# Altium PCB STM32F302VC_EVM.PcbDoc (part 18 of 19)
Units mil, origin at the board's own origin, x right, y up, seen from the top; angles counter-clockwise.
Board outline 3937.01 x 3937.01 mil, 2 copper layers (Top Layer, Bottom Layer); 117 components, 166 nets, 602 pads, 373 vias.
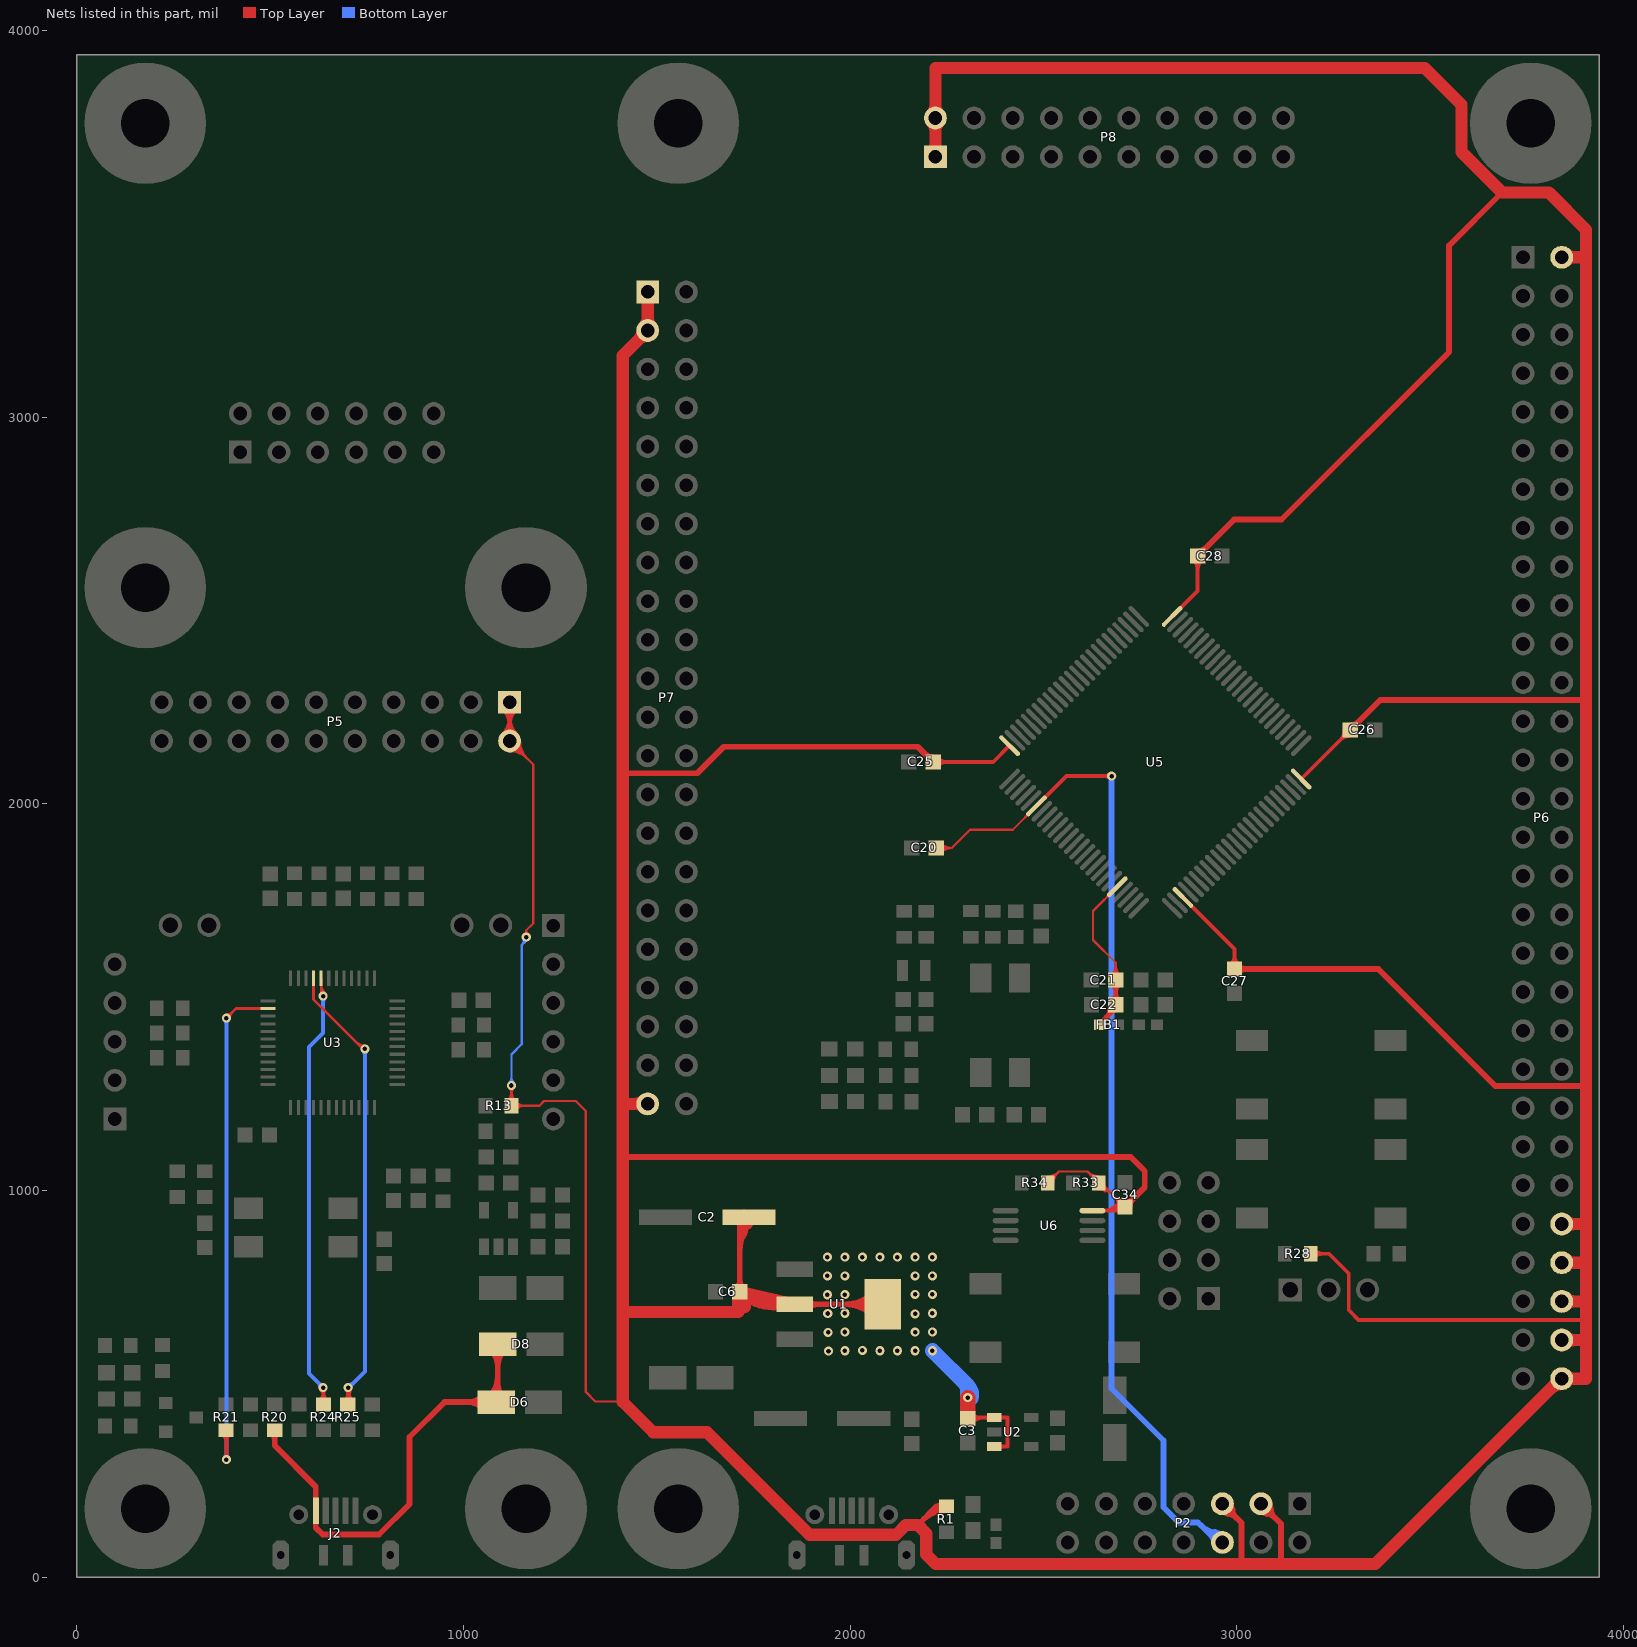
[diagram p18: the nets of this part, all layers, seen from the top]

## Via types
v1: diameter 23.62, hole 11.81, Top Layer to Bottom Layer, tented both sides, 372 vias
v2: diameter 50, hole 28, Top Layer to Bottom Layer, tented both sides, 1 vias

## Nets (pads, with @x,y where several pads share a name; then routed paths per layer and width w, separated by ;. In a path a pad name is that pad's centre, name@x,y a point inside that pad or via, vN(x,y) a via of type N, cw(c..) or ccw(c..) an arc to the next point about the centre after c; other vN are vias at no path point) (continued)
TVCC: C2.1 C3.2 C6.2 C25.2 C26.2 C27.2 C28.2 C34.2 P2.3 P2.5 P5.1 P5.2 P6.2 P6.52 P6.54 P6.56 P6.58 P6.60 P7.1 P7.3 P7.43 P8.1 P8.2 R1.1 R13.1 R28.2 R33.2 R34.1 U1.2 U1.4 U2.1 U2.3 U5.28 U5.50 U5.75 U5.100 U6.8 | length 36358.6
  Top Layer w6: P5.2@1119.29,2162.6 1180.26,2101.63 1180.26,1690.85 1162.4,1672.99 ; v1(1124.02,1271.65) R13.1@1124.02,1219.49 1196.56,1219.49 1208.37,1231.3 1290.35,1231.3 1316.53,1205.12 1316.53,478.78 1340.98,454.33 1411.36,454.33 1411.95,453.74 ; v1(1162.4,1655.51) 1162.4,1672.99 ; R34.1@2510.83,1019.68 2540.35,1049.21 2613.39,1049.21 R33.2@2642.91,1019.68 2648.75,1019.68 C34.2@2710.76,957.68 ; R13.1@1113.61,1231.86 ccw(c1088.49,1256.99) 1124.02,1256.99 ; R13.1@1113.61,1231.86 ccw(c1088.49,1256.99) 1124.02,1256.99 ; R13.1@1113.61,1231.86 ccw(c1088.49,1256.99) 1124.02,1256.99 ; P5.2@1115.83,2162.34 ccw(c1143.63,2164.41) 1136.42,2137.48 ; P5.2@1115.83,2162.34 ccw(c1143.63,2164.41) 1136.42,2137.48 ; P5.2@1115.83,2162.34 ccw(c1143.63,2164.41) 1136.42,2137.48 ; v1@1117.79,1265.42 cw(c1102.74,1250.38) 1124.02,1250.38 ; v1@1117.79,1265.42 cw(c1102.74,1250.38) 1124.02,1250.38 ; v1@1117.79,1265.42 cw(c1102.74,1250.38) 1124.02,1250.38 ; R13.1@1117.85,1227.62 ccw(c1102.97,1242.5) 1124.02,1242.5 ; R13.1@1117.85,1227.62 ccw(c1102.97,1242.5) 1124.02,1242.5 ; R13.1@1117.85,1227.62 ccw(c1102.97,1242.5) 1124.02,1242.5 ; P5.2@1119.1,2160.08 cw(c1116.81,2129.33) 1146.6,2137.31 ; P5.2@1119.1,2160.08 cw(c1116.81,2129.33) 1146.6,2137.31 ; P5.2@1119.1,2160.08 cw(c1116.81,2129.33) 1146.6,2137.31 ; P5.2@1119.29,2136.07 cw(c1119.29,2072.03) 1164.58,2117.31 ; P5.2@1119.29,2136.07 cw(c1119.29,2072.03) 1164.58,2117.31 ; P5.2@1119.29,2136.07 cw(c1119.29,2072.03) 1164.58,2117.31 ; P5.2@1119.29,2142.07 cw(c1119.29,2092.51) 1154.33,2127.56 ; P5.2@1119.29,2142.07 cw(c1119.29,2092.51) 1154.33,2127.56 ; P5.2@1119.29,2142.07 cw(c1119.29,2092.51) 1154.33,2127.56 ; P5.2@1119.29,2148.07 cw(c1119.29,2113) 1144.09,2137.8 ; P5.2@1119.29,2148.07 cw(c1119.29,2113) 1144.09,2137.8 ; P5.2@1119.29,2148.07 cw(c1119.29,2113) 1144.09,2137.8 ; P5.2@1119.55,2166.06 cw(c1117.48,2138.26) 1144.41,2145.47 ; P5.2@1119.55,2166.06 cw(c1117.48,2138.26) 1144.41,2145.47 ; P5.2@1119.55,2166.06 cw(c1117.48,2138.26) 1144.41,2145.47 ; P5.2@1121.81,2162.79 ccw(c1152.56,2165.08) 1144.58,2135.29 ; P5.2@1121.81,2162.79 ccw(c1152.56,2165.08) 1144.58,2135.29 ; P5.2@1121.81,2162.79 ccw(c1152.56,2165.08) 1144.58,2135.29 ; 1124.02,1242.5 ccw(c1145.06,1242.5) R13.1@1130.18,1227.62 ; 1124.02,1242.5 ccw(c1145.06,1242.5) R13.1@1130.18,1227.62 ; 1124.02,1242.5 ccw(c1145.06,1242.5) R13.1@1130.18,1227.62 ; 1124.02,1250.38 cw(c1145.29,1250.38) v1@1130.25,1265.42 ; 1124.02,1250.38 cw(c1145.29,1250.38) v1@1130.25,1265.42 ; 1124.02,1250.38 cw(c1145.29,1250.38) v1@1130.25,1265.42 ; 1124.02,1256.99 ccw(c1159.54,1256.99) R13.1@1134.42,1231.86 ; 1124.02,1256.99 ccw(c1159.54,1256.99) R13.1@1134.42,1231.86 ; 1124.02,1256.99 ccw(c1159.54,1256.99) R13.1@1134.42,1231.86 ; R13.1@1130.18,1213.32 cw(c1145.06,1198.44) 1145.06,1219.49 ; R13.1@1130.18,1213.32 cw(c1145.06,1198.44) 1145.06,1219.49 ; R13.1@1130.18,1213.32 cw(c1145.06,1198.44) 1145.06,1219.49 ; R13.1@1130.18,1225.65 ccw(c1145.06,1240.53) 1145.06,1219.49 ; R13.1@1130.18,1225.65 ccw(c1145.06,1240.53) 1145.06,1219.49 ; R13.1@1130.18,1225.65 ccw(c1145.06,1240.53) 1145.06,1219.49 ; P5.2@1133.82,2162.6 ccw(c1168.89,2162.6) 1144.09,2137.8 ; P5.2@1133.82,2162.6 ccw(c1168.89,2162.6) 1144.09,2137.8 ; P5.2@1133.82,2162.6 ccw(c1168.89,2162.6) 1144.09,2137.8 ; R13.1@1134.42,1209.08 cw(c1159.54,1183.96) 1159.54,1219.49 ; R13.1@1134.42,1209.08 cw(c1159.54,1183.96) 1159.54,1219.49 ; R13.1@1134.42,1209.08 cw(c1159.54,1183.96) 1159.54,1219.49 ; R13.1@1134.42,1229.89 ccw(c1159.54,1255.02) 1159.54,1219.49 ; R13.1@1134.42,1229.89 ccw(c1159.54,1255.02) 1159.54,1219.49 ; R13.1@1134.42,1229.89 ccw(c1159.54,1255.02) 1159.54,1219.49 ; P5.2@1139.82,2162.6 ccw(c1189.38,2162.6) 1154.33,2127.56 ; P5.2@1139.82,2162.6 ccw(c1189.38,2162.6) 1154.33,2127.56 ; P5.2@1139.82,2162.6 ccw(c1189.38,2162.6) 1154.33,2127.56 ; P5.2@1145.82,2162.6 ccw(c1209.86,2162.6) 1164.58,2117.31 ; P5.2@1145.82,2162.6 ccw(c1209.86,2162.6) 1164.58,2117.31 ; P5.2@1145.82,2162.6 ccw(c1209.86,2162.6) 1164.58,2117.31 ; v1@1157.16,1662.6 ccw(c1149.47,1672.99) 1162.4,1672.99 ; v1@1157.16,1662.6 ccw(c1149.47,1672.99) 1162.4,1672.99 ; v1@1157.16,1662.6 ccw(c1149.47,1672.99) 1162.4,1672.99 ; 1162.4,1672.99 ccw(c1175.33,1672.99) v1@1167.64,1662.6 ; 1162.4,1672.99 ccw(c1175.33,1672.99) v1@1167.64,1662.6 ; 1162.4,1672.99 ccw(c1175.33,1672.99) v1@1167.64,1662.6 ; R34.1@2507.64,1022.46 cw(c2531.5,1016.44) 2525.13,1040.2 ; R34.1@2507.64,1022.46 cw(c2531.5,1016.44) 2525.13,1040.2 ; R34.1@2507.64,1022.46 cw(c2531.5,1016.44) 2525.13,1040.2 ; R34.1@2510.83,1030.37 ccw(c2510.83,1056.17) 2529.07,1037.93 ; R34.1@2510.83,1030.37 ccw(c2510.83,1056.17) 2529.07,1037.93 ; R34.1@2510.83,1030.37 ccw(c2510.83,1056.17) 2529.07,1037.93 ; R34.1@2510.83,1036.37 ccw(c2510.83,1076.65) 2539.31,1048.17 ; R34.1@2510.83,1036.37 ccw(c2510.83,1076.65) 2539.31,1048.17 ; R34.1@2510.83,1036.37 ccw(c2510.83,1076.65) 2539.31,1048.17 ; R34.1@2511.33,1018.41 ccw(c2508.03,1039.75) 2528.9,1034.16 ; R34.1@2511.33,1018.41 ccw(c2508.03,1039.75) 2528.9,1034.16 ; R34.1@2511.33,1018.41 ccw(c2508.03,1039.75) 2528.9,1034.16 ; R34.1@2519.54,1021.65 cw(c2535.83,1021.65) R34.1@2524.31,1033.17 ; R34.1@2519.54,1021.65 cw(c2535.83,1021.65) R34.1@2524.31,1033.17 ; R34.1@2519.54,1021.65 cw(c2535.83,1021.65) R34.1@2524.31,1033.17 ; R34.1@2525.54,1021.65 cw(c2556.32,1021.65) 2534.56,1043.42 ; R34.1@2525.54,1021.65 cw(c2556.32,1021.65) 2534.56,1043.42 ; R34.1@2525.54,1021.65 cw(c2556.32,1021.65) 2534.56,1043.42 ; 2614.43,1048.17 ccw(c2642.91,1076.65) R33.2@2642.91,1036.37 ; 2614.43,1048.17 ccw(c2642.91,1076.65) R33.2@2642.91,1036.37 ; 2614.43,1048.17 ccw(c2642.91,1076.65) R33.2@2642.91,1036.37 ; 2619.18,1043.42 cw(c2597.42,1021.65) R33.2@2628.2,1021.65 ; 2619.18,1043.42 cw(c2597.42,1021.65) R33.2@2628.2,1021.65 ; 2619.18,1043.42 cw(c2597.42,1021.65) R33.2@2628.2,1021.65 ; 2624.67,1037.93 ccw(c2642.91,1056.17) R33.2@2642.91,1030.37 ; 2624.67,1037.93 ccw(c2642.91,1056.17) R33.2@2642.91,1030.37 ; 2624.67,1037.93 ccw(c2642.91,1056.17) R33.2@2642.91,1030.37 ; 2624.85,1034.16 ccw(c2645.71,1039.75) R33.2@2642.41,1018.41 ; 2624.85,1034.16 ccw(c2645.71,1039.75) R33.2@2642.41,1018.41 ; 2624.85,1034.16 ccw(c2645.71,1039.75) R33.2@2642.41,1018.41 ; 2628.61,1040.2 cw(c2622.24,1016.44) R33.2@2646.1,1022.46 ; 2628.61,1040.2 cw(c2622.24,1016.44) R33.2@2646.1,1022.46 ; 2628.61,1040.2 cw(c2622.24,1016.44) R33.2@2646.1,1022.46 ; R33.2@2629.43,1033.17 cw(c2617.91,1021.65) R33.2@2634.2,1021.65 ; R33.2@2629.43,1033.17 cw(c2617.91,1021.65) R33.2@2634.2,1021.65 ; R33.2@2629.43,1033.17 cw(c2617.91,1021.65) R33.2@2634.2,1021.65 ; R33.2@2639.85,1016.55 ccw(c2667.55,1027.09) 2659.88,998.45 ; R33.2@2639.85,1016.55 ccw(c2667.55,1027.09) 2659.88,998.45 ; R33.2@2639.85,1016.55 ccw(c2667.55,1027.09) 2659.88,998.45 ; R33.2@2642.91,1003 cw(c2642.91,948.64) 2681.36,987.08 ; R33.2@2642.91,1003 cw(c2642.91,948.64) 2681.36,987.08 ; R33.2@2642.91,1003 cw(c2642.91,948.64) 2681.36,987.08 ; R33.2@2642.91,1009 cw(c2642.91,969.12) 2671.11,997.32 ; R33.2@2642.91,1009 cw(c2642.91,969.12) 2671.11,997.32 ; R33.2@2642.91,1009 cw(c2642.91,969.12) 2671.11,997.32 ; R33.2@2642.91,1015 cw(c2642.91,989.61) 2660.87,1007.56 ; R33.2@2642.91,1015 cw(c2642.91,989.61) 2660.87,1007.56 ; R33.2@2642.91,1015 cw(c2642.91,989.61) 2660.87,1007.56 ; R33.2@2645.45,1018.68 ccw(c2681.08,1032.23) 2671.21,995.42 ; R33.2@2645.45,1018.68 ccw(c2681.08,1032.23) 2671.21,995.42 ; R33.2@2645.45,1018.68 ccw(c2681.08,1032.23) 2671.21,995.42 ; R33.2@2645.58,1018.26 ccw(c2662.68,1021.78) R33.2@2658.16,1004.91 ; R33.2@2645.58,1018.26 ccw(c2662.68,1021.78) R33.2@2658.16,1004.91 ; R33.2@2645.58,1018.26 ccw(c2662.68,1021.78) R33.2@2658.16,1004.91 ; R33.2@2657.63,1017.72 ccw(c2674.32,1017.72) 2662.52,1005.91 ; R33.2@2657.63,1017.72 ccw(c2674.32,1017.72) 2662.52,1005.91 ; R33.2@2657.63,1017.72 ccw(c2674.32,1017.72) 2662.52,1005.91 ; 2682.27,986.16 cw(c2653.79,957.68) C34.2@2694.07,957.68 ; 2682.27,986.16 ccw(c2710.76,1014.64) C34.2@2710.76,974.36 ; 2682.27,986.16 ccw(c2710.76,1014.64) C34.2@2710.76,974.36 ; 2682.27,986.16 cw(c2653.79,957.68) C34.2@2694.07,957.68 ; 2682.27,986.16 ccw(c2710.76,1014.64) C34.2@2710.76,974.36 ; 2682.27,986.16 cw(c2653.79,957.68) C34.2@2694.07,957.68 ; 2688.99,976.64 ccw(c2716.13,983.91) C34.2@2710.49,956.39 ; 2688.99,976.64 ccw(c2716.13,983.91) C34.2@2710.49,956.39 ; 2688.99,976.64 ccw(c2716.13,983.91) C34.2@2710.49,956.39 ; C34.2@2691.5,967.26 ccw(c2713.95,973.28) C34.2@2709.29,950.51 ; C34.2@2691.5,967.26 ccw(c2713.95,973.28) C34.2@2709.29,950.51 ; C34.2@2691.5,967.26 ccw(c2713.95,973.28) C34.2@2709.29,950.51 ; 2691.79,979.44 cw(c2684.52,952.3) C34.2@2712.04,957.94 ; 2691.79,979.44 cw(c2684.52,952.3) C34.2@2712.04,957.94 ; 2691.79,979.44 cw(c2684.52,952.3) C34.2@2712.04,957.94 ; C34.2@2692.52,975.92 cw(c2674.27,957.68) C34.2@2700.07,957.68 ; C34.2@2692.52,975.92 ccw(c2710.76,994.16) C34.2@2710.76,968.36 ; C34.2@2692.52,975.92 ccw(c2710.76,994.16) C34.2@2710.76,968.36 ; C34.2@2692.52,975.92 cw(c2674.27,957.68) C34.2@2700.07,957.68 ; C34.2@2692.52,975.92 ccw(c2710.76,994.16) C34.2@2710.76,968.36 ; C34.2@2692.52,975.92 cw(c2674.27,957.68) C34.2@2700.07,957.68 ; C34.2@2701.17,976.93 cw(c2695.15,954.48) C34.2@2717.92,959.14 ; C34.2@2701.17,976.93 cw(c2695.15,954.48) C34.2@2717.92,959.14 ; C34.2@2701.17,976.93 cw(c2695.15,954.48) C34.2@2717.92,959.14
  Top Layer w10: P5.2@1119.29,2162.6 P5.1@1119.29,2262.6 ; C25.2@2214.57,2108.27 2369.99,2108.27 U5.100@2412.15,2150.43 ; C3.2@2304.13,410.43 2306.5,412.8 U2.1@2372.05,412.8 2406.5,412.8 2406.5,337.99 U2.3@2372.05,337.99 ; U6.8@2626.46,947.83 2700.91,947.83 C34.2@2710.76,957.68 ; U5.75@2832.52,2484.5 2898.62,2550.6 C28.2@2898.62,2640.75 ; U5.28@2860.36,1757.91 2994.09,1624.17 C27.2@2994.09,1572.83 ; U5.50@3166.59,2064.13 3166.59,2064.22 C26.2@3293.31,2190.94 ; R28.2@3190.94,836.61 3238.24,836.61 3289.37,785.48 3289.37,690.94 3314.96,665.35 3901.24,665.35 ; P5.2@1101.95,2179.94 ccw(c1060.08,2221.81) 1119.29,2221.81 ; P5.2@1101.95,2179.94 ccw(c1060.08,2221.81) 1119.29,2221.81 ; P5.2@1101.95,2179.94 ccw(c1060.08,2221.81) 1119.29,2221.81 ; P5.1@1101.95,2245.25 cw(c1060.08,2203.38) 1119.29,2203.38 ; P5.1@1101.95,2245.25 cw(c1060.08,2203.38) 1119.29,2203.38 ; P5.1@1101.95,2245.25 cw(c1060.08,2203.38) 1119.29,2203.38 ; P5.2@1109.02,2172.87 ccw(c1084.22,2197.67) 1119.29,2197.67 ; P5.2@1109.02,2172.87 ccw(c1084.22,2197.67) 1119.29,2197.67 ; P5.2@1109.02,2172.87 ccw(c1084.22,2197.67) 1119.29,2197.67 ; P5.1@1109.02,2252.33 cw(c1084.22,2227.53) 1119.29,2227.53 ; P5.1@1109.02,2252.33 cw(c1084.22,2227.53) 1119.29,2227.53 ; P5.1@1109.02,2252.33 cw(c1084.22,2227.53) 1119.29,2227.53 ; 1119.29,2197.67 ccw(c1154.36,2197.67) P5.2@1129.56,2172.87 ; 1119.29,2197.67 ccw(c1154.36,2197.67) P5.2@1129.56,2172.87 ; 1119.29,2197.67 ccw(c1154.36,2197.67) P5.2@1129.56,2172.87 ; 1119.29,2203.38 cw(c1178.51,2203.38) P5.1@1136.63,2245.25 ; 1119.29,2203.38 cw(c1178.51,2203.38) P5.1@1136.63,2245.25 ; 1119.29,2203.38 cw(c1178.51,2203.38) P5.1@1136.63,2245.25 ; 1119.29,2221.81 ccw(c1178.51,2221.81) P5.2@1136.63,2179.94 ; 1119.29,2221.81 ccw(c1178.51,2221.81) P5.2@1136.63,2179.94 ; 1119.29,2221.81 ccw(c1178.51,2221.81) P5.2@1136.63,2179.94 ; 1119.29,2227.53 cw(c1154.36,2227.53) P5.1@1129.56,2252.33 ; 1119.29,2227.53 cw(c1154.36,2227.53) P5.1@1129.56,2252.33 ; 1119.29,2227.53 cw(c1154.36,2227.53) P5.1@1129.56,2252.33 ; C25.2@2224.95,2097.88 cw(c2250.02,2072.82) 2250.02,2108.27 ; C25.2@2224.95,2097.88 cw(c2250.02,2072.82) 2250.02,2108.27 ; C25.2@2224.95,2097.88 cw(c2250.02,2072.82) 2250.02,2108.27 ; C25.2@2224.95,2118.65 ccw(c2250.02,2143.72) 2250.02,2108.27 ; C25.2@2224.95,2118.65 ccw(c2250.02,2143.72) 2250.02,2108.27 ; C25.2@2224.95,2118.65 ccw(c2250.02,2143.72) 2250.02,2108.27 ; C3.2@2314.52,400.05 cw(c2345.29,369.28) 2345.29,412.8 ; C3.2@2314.52,400.05 cw(c2345.29,369.28) 2345.29,412.8 ; C3.2@2314.52,400.05 cw(c2345.29,369.28) 2345.29,412.8 ; C3.2@2314.52,420.82 ccw(c2333.88,440.18) 2333.88,412.8 ; C3.2@2314.52,420.82 ccw(c2333.88,440.18) 2333.88,412.8 ; C3.2@2314.52,420.82 ccw(c2333.88,440.18) 2333.88,412.8 ; 2348.71,412.8 cw(c2348.71,396.35) U2.1@2360.34,407.98 ; 2348.71,412.8 ccw(c2348.71,429.24) U2.1@2360.34,417.61 ; 2348.71,412.8 ccw(c2348.71,429.24) U2.1@2360.34,417.61 ; 2348.71,412.8 cw(c2348.71,396.35) U2.1@2360.34,407.98 ; 2348.71,412.8 ccw(c2348.71,429.24) U2.1@2360.34,417.61 ; 2348.71,412.8 cw(c2348.71,396.35) U2.1@2360.34,407.98 ; U2.3@2383.75,333.18 cw(c2395.38,321.55) 2395.38,337.99 ; U2.3@2383.75,333.18 cw(c2395.38,321.55) 2395.38,337.99 ; U2.3@2383.75,333.18 cw(c2395.38,321.55) 2395.38,337.99 ; U2.3@2383.75,342.81 ccw(c2395.38,354.44) 2395.38,337.99 ; U2.3@2383.75,342.81 ccw(c2395.38,354.44) 2395.38,337.99 ; U2.3@2383.75,342.81 ccw(c2395.38,354.44) 2395.38,337.99 ; U2.1@2383.75,407.98 cw(c2395.38,396.35) 2395.38,412.8 ; U2.1@2383.75,407.98 cw(c2395.38,396.35) 2395.38,412.8 ; U2.1@2383.75,407.98 cw(c2395.38,396.35) 2395.38,412.8 ; U2.1@2383.75,417.61 ccw(c2395.38,429.24) 2395.38,412.8 ; U2.1@2383.75,417.61 ccw(c2395.38,429.24) 2395.38,412.8 ; U2.1@2383.75,417.61 ccw(c2395.38,429.24) 2395.38,412.8 ; U6.8@2651.54,947.83 ccw(c2651.54,1016.89) C34.2@2700.37,968.06 ; U6.8@2651.54,947.83 ccw(c2651.54,1016.89) C34.2@2700.37,968.06 ; U6.8@2651.54,947.83 ccw(c2651.54,1016.89) C34.2@2700.37,968.06 ; 2675.68,947.83 ccw(c2675.68,992.75) C34.2@2707.44,960.99 ; 2675.68,947.83 ccw(c2675.68,992.75) C34.2@2707.44,960.99 ; 2675.68,947.83 ccw(c2675.68,992.75) C34.2@2707.44,960.99 ; 2676.51,954.28 cw(c2684.9,939.75) C34.2@2698.69,949.31 ; 2676.51,954.28 cw(c2684.9,939.75) C34.2@2698.69,949.31 ; 2676.51,954.28 cw(c2684.9,939.75) C34.2@2698.69,949.31 ; 2685.91,959.71 cw(c2693.85,945.96) C34.2@2706.91,955.01 ; 2685.91,959.71 cw(c2693.85,945.96) C34.2@2706.91,955.01 ; 2685.91,959.71 cw(c2693.85,945.96) C34.2@2706.91,955.01 ; 2689.57,950.67 cw(c2693.24,944.31) C34.2@2699.08,948.77 ; 2689.57,950.67 ccw(c2682.63,962.7) C34.2@2696.3,960.26 ; 2689.57,950.67 cw(c2693.24,944.31) C34.2@2699.08,948.77 ; 2689.57,950.67 ccw(c2682.63,962.7) C34.2@2696.3,960.26 ; 2689.57,950.67 ccw(c2682.63,962.7) C34.2@2696.3,960.26 ; 2689.57,950.67 cw(c2693.24,944.31) C34.2@2699.08,948.77 ; C28.2@2888.24,2630.36 cw(c2863.17,2605.3) 2898.62,2605.3 ; C28.2@2888.24,2630.36 cw(c2863.17,2605.3) 2898.62,2605.3 ; C28.2@2888.24,2630.36 cw(c2863.17,2605.3) 2898.62,2605.3 ; 2898.62,2605.3 cw(c2934.07,2605.3) C28.2@2909.01,2630.36 ; 2898.62,2605.3 cw(c2934.07,2605.3) C28.2@2909.01,2630.36 ; 2898.62,2605.3 cw(c2934.07,2605.3) C28.2@2909.01,2630.36 ; C27.2@2983.71,1583.22 ccw(c2958.64,1608.29) 2994.09,1608.29 ; C27.2@2983.71,1583.22 ccw(c2958.64,1608.29) 2994.09,1608.29 ; C27.2@2983.71,1583.22 ccw(c2958.64,1608.29) 2994.09,1608.29 ; 2994.09,1608.29 ccw(c3029.55,1608.29) C27.2@3004.48,1583.22 ; 2994.09,1608.29 ccw(c3029.55,1608.29) C27.2@3004.48,1583.22 ; 2994.09,1608.29 ccw(c3029.55,1608.29) C27.2@3004.48,1583.22 ; R28.2@3199.94,827.62 cw(c3221.65,805.91) 3221.65,836.61 ; R28.2@3199.94,827.62 cw(c3221.65,805.91) 3221.65,836.61 ; R28.2@3199.94,827.62 cw(c3221.65,805.91) 3221.65,836.61 ; R28.2@3199.94,845.61 ccw(c3221.65,867.31) 3221.65,836.61 ; R28.2@3199.94,845.61 ccw(c3221.65,867.31) 3221.65,836.61 ; R28.2@3199.94,845.61 ccw(c3221.65,867.31) 3221.65,836.61 ; 3268.24,2165.88 cw(c3293.31,2140.81) C26.2@3293.31,2176.26 ; 3268.24,2165.88 ccw(c3243.17,2190.94) C26.2@3278.62,2190.94 ; 3268.24,2165.88 ccw(c3243.17,2190.94) C26.2@3278.62,2190.94 ; 3268.24,2165.88 cw(c3293.31,2140.81) C26.2@3293.31,2176.26 ; 3268.24,2165.88 ccw(c3243.17,2190.94) C26.2@3278.62,2190.94 ; 3268.24,2165.88 cw(c3293.31,2140.81) C26.2@3293.31,2176.26
  Top Layer w15: 1411.95,1077.76 1420.81,1086.61 2725.39,1086.61 2761.81,1050.2 2761.81,1008.73 C34.2@2710.76,957.68 ; 1411.95,2079.04 1604.33,2079.04 1673.16,2147.87 2174.96,2147.87 C25.2@2214.57,2108.27 ; C6.2@1710.63,739.17 1714.57,705.71 C6.2@1714.57,738.19 1714.57,931.1 C2.1@1738.19,931.1 ; 1718.11,905.92 ccw(c1708.83,921.99) C2.1@1726.55,927.49 ; 1727.71,908.83 cw(c1761.04,910.79) C2.1@1736.08,932.97 ; U1.2@1856.3,705.71 U1.4@2084.65,705.71 ; 2175.2,134.84 2223.92,183.56 ; 2216.84,167.31 cw(c2235.71,148.44) R1.1@2243.91,173.84 ; R1.1@2249.02,183.56 2223.92,183.56 ; C28.2@2898.62,2640.75 2992.89,2735.02 3115.38,2735.02 3548.88,3168.51 3548.88,3443.89 3685.6,3580.61 ; P2.5@2962.4,189.96 3011.81,140.55 ; C27.2@2994.09,1572.83 3365.85,1572.83 3668.33,1270.36 3901.72,1270.36 3903.01,1271.65 ; 3011.81,34 3011.81,139.37 ; P2.3@3062.4,189.96 3114.17,138.19 3114.17,34.98 3113.19,34 ; C26.2@3293.31,2190.94 3370.78,2268.41 3902.31,2268.41 3903.01,2267.72 ; C6.2@1705.95,729.57 cw(c1685.15,708.77) 1714.57,708.77 ; C6.2@1705.95,729.57 cw(c1685.15,708.77) 1714.57,708.77 ; C6.2@1705.95,729.57 cw(c1685.15,708.77) 1714.57,708.77 ; C6.2@1705.95,746.81 ccw(c1685.15,767.61) 1714.57,767.61 ; C6.2@1705.95,746.81 ccw(c1685.15,767.61) 1714.57,767.61 ; C6.2@1705.95,746.81 ccw(c1685.15,767.61) 1714.57,767.61 ; 1714.57,708.77 cw(c1743.98,708.77) C6.2@1723.18,729.57 ; 1714.57,708.77 cw(c1743.98,708.77) C6.2@1723.18,729.57 ; 1714.57,708.77 cw(c1743.98,708.77) C6.2@1723.18,729.57 ; 1714.57,767.61 ccw(c1743.98,767.61) C6.2@1723.18,746.81 ; 1714.57,767.61 ccw(c1743.98,767.61) C6.2@1723.18,746.81 ; 1714.57,767.61 ccw(c1743.98,767.61) C6.2@1723.18,746.81 ; 1714.57,844.66 cw(c1824.63,844.66) C2.1@1746.81,922.49 ; 1714.57,844.66 cw(c1824.63,844.66) C2.1@1746.81,922.49 ; 1714.57,844.66 cw(c1824.63,844.66) C2.1@1746.81,922.49 ; 1714.57,880.87 cw(c1788.42,880.87) C2.1@1736.2,933.09 ; 1714.57,880.87 cw(c1788.42,880.87) C2.1@1736.2,933.09 ; 1714.57,880.87 cw(c1788.42,880.87) C2.1@1736.2,933.09 ; C2.1@1714.57,917.08 cw(c1752.21,917.08) C2.1@1725.59,943.7 ; C2.1@1714.57,917.08 cw(c1752.21,917.08) C2.1@1725.59,943.7 ; C2.1@1714.57,917.08 cw(c1752.21,917.08) C2.1@1725.59,943.7 ; 1717.84,901.3 cw(c1751.36,881.95) C2.1@1741.34,919.33 ; 1717.84,901.3 cw(c1751.36,881.95) C2.1@1741.34,919.33 ; 1717.84,901.3 cw(c1751.36,881.95) C2.1@1741.34,919.33 ; 1721.72,879.03 ccw(c1670.49,908.61) C2.1@1726.63,927.26 ; 1721.72,879.03 ccw(c1670.49,908.61) C2.1@1726.63,927.26 ; 1721.72,879.03 ccw(c1670.49,908.61) C2.1@1726.63,927.26 ; C2.1@1724.41,912.67 ccw(c1706.97,922.74) C2.1@1726.42,927.95 ; C2.1@1724.41,912.67 ccw(c1706.97,922.74) C2.1@1726.42,927.95 ; C2.1@1724.41,912.67 ccw(c1706.97,922.74) C2.1@1726.42,927.95 ; 1738.41,907.95 ccw(c1712.88,922.69) C2.1@1740.86,931.99 ; 1738.41,907.95 ccw(c1712.88,922.69) C2.1@1740.86,931.99 ; 1738.41,907.95 ccw(c1712.88,922.69) C2.1@1740.86,931.99 ; U1.2@1892.47,697.09 cw(c1913.28,676.29) 1913.28,705.71 ; U1.2@1892.47,697.09 cw(c1913.28,676.29) 1913.28,705.71 ; U1.2@1892.47,697.09 cw(c1913.28,676.29) 1913.28,705.71 ; U1.2@1892.47,714.32 ccw(c1913.28,735.13) 1913.28,705.71 ; U1.2@1892.47,714.32 ccw(c1913.28,735.13) 1913.28,705.71 ; U1.2@1892.47,714.32 ccw(c1913.28,735.13) 1913.28,705.71 ; 1988.7,705.71 cw(c1988.7,609.76) U1.4@2056.54,677.61 ; 1988.7,705.71 ccw(c1988.7,801.66) U1.4@2056.54,733.81 ; 1988.7,705.71 ccw(c1988.7,801.66) U1.4@2056.54,733.81 ; 1988.7,705.71 cw(c1988.7,609.76) U1.4@2056.54,677.61 ; 1988.7,705.71 ccw(c1988.7,801.66) U1.4@2056.54,733.81 ; 1988.7,705.71 cw(c1988.7,609.76) U1.4@2056.54,677.61 ; 2024.91,705.71 cw(c2024.91,645.97) U1.4@2067.15,688.21 ; 2024.91,705.71 ccw(c2024.91,765.45) U1.4@2067.15,723.21 ; 2024.91,705.71 ccw(c2024.91,765.45) U1.4@2067.15,723.21 ; 2024.91,705.71 cw(c2024.91,645.97) U1.4@2067.15,688.21 ; 2024.91,705.71 ccw(c2024.91,765.45) U1.4@2067.15,723.21 ; 2024.91,705.71 cw(c2024.91,645.97) U1.4@2067.15,688.21 ; 2190.12,149.77 cw(c2247.05,92.84) R1.1@2247.05,173.35 ; 2190.12,149.77 cw(c2247.05,92.84) R1.1@2247.05,173.35 ; 2190.12,149.77 cw(c2247.05,92.84) R1.1@2247.05,173.35 ; 2193.77,2129.07 cw(c2172.96,2108.27) C25.2@2202.38,2108.27 ; 2193.77,2129.07 ccw(c2214.57,2149.87) C25.2@2214.57,2120.45 ; 2193.77,2129.07 ccw(c2214.57,2149.87) C25.2@2214.57,2120.45 ; 2193.77,2129.07 cw(c2172.96,2108.27) C25.2@2202.38,2108.27 ; 2193.77,2129.07 ccw(c2214.57,2149.87) C25.2@2214.57,2120.45 ; 2193.77,2129.07 cw(c2172.96,2108.27) C25.2@2202.38,2108.27 ; 2202.76,161.48 ccw(c2187.66,217.85) R1.1@2238.2,188.67 ; 2202.76,161.48 ccw(c2187.66,217.85) R1.1@2238.2,188.67 ; 2202.76,161.48 ccw(c2187.66,217.85) R1.1@2238.2,188.67 ; 2215.73,175.37 cw(c2247.05,144.05) R1.1@2247.05,188.35 ; 2215.73,175.37 cw(c2247.05,144.05) R1.1@2247.05,188.35 ; 2215.73,175.37 cw(c2247.05,144.05) R1.1@2247.05,188.35 ; 2223.92,183.56 cw(c2223.92,162.49) R1.1@2239.5,176.68 ; 2223.92,183.56 ccw(c2223.92,204.64) R1.1@2239.5,190.44 ; 2223.92,183.56 ccw(c2223.92,204.64) R1.1@2239.5,190.44 ; 2223.92,183.56 cw(c2223.92,162.49) R1.1@2239.5,176.68 ; 2223.92,183.56 ccw(c2223.92,204.64) R1.1@2239.5,190.44 ; 2223.92,183.56 cw(c2223.92,162.49) R1.1@2239.5,176.68 ; C34.2@2710.76,969.86 ccw(c2710.76,999.28) 2731.56,978.48 ; C34.2@2710.76,969.86 ccw(c2710.76,999.28) 2731.56,978.48 ; C34.2@2710.76,969.86 ccw(c2710.76,999.28) 2731.56,978.48 ; C34.2@2722.94,957.68 cw(c2752.36,957.68) 2731.56,978.48 ; C34.2@2722.94,957.68 cw(c2752.36,957.68) 2731.56,978.48 ; C34.2@2722.94,957.68 cw(c2752.36,957.68) 2731.56,978.48 ; C28.2@2898.62,2652.93 ccw(c2898.62,2682.35) 2919.42,2661.55 ; C28.2@2898.62,2652.93 ccw(c2898.62,2682.35) 2919.42,2661.55 ; C28.2@2898.62,2652.93 ccw(c2898.62,2682.35) 2919.42,2661.55 ; C28.2@2910.81,2640.75 cw(c2940.22,2640.75) 2919.42,2661.55 ; C28.2@2910.81,2640.75 cw(c2940.22,2640.75) 2919.42,2661.55 ; C28.2@2910.81,2640.75 cw(c2940.22,2640.75) 2919.42,2661.55 ; P2.5@2954.59,188.36 ccw(c2985.99,194.79) 2977.69,163.84 ; P2.5@2954.59,188.36 ccw(c2985.99,194.79) 2977.69,163.84 ; P2.5@2954.59,188.36 ccw(c2985.99,194.79) 2977.69,163.84 ; P2.5@2962.4,167.93 cw(c2962.4,114.75) 3000,152.36 ; P2.5@2962.4,167.93 cw(c2962.4,114.75) 3000,152.36 ; P2.5@2962.4,167.93 cw(c2962.4,114.75) 3000,152.36 ; P2.5@2964,197.77 cw(c2957.57,166.38) 2988.53,174.67 ; P2.5@2964,197.77 cw(c2957.57,166.38) 2988.53,174.67 ; P2.5@2964,197.77 cw(c2957.57,166.38) 2988.53,174.67 ; P2.5@2984.43,189.96 ccw(c3037.61,189.96) 3000,152.36 ; P2.5@2984.43,189.96 ccw(c3037.61,189.96) 3000,152.36 ; P2.5@2984.43,189.96 ccw(c3037.61,189.96) 3000,152.36 ; C27.2@3002.71,1564.22 cw(c3023.51,1543.42) 3023.51,1572.83 ; C27.2@3002.71,1564.22 cw(c3023.51,1543.42) 3023.51,1572.83 ; C27.2@3002.71,1564.22 cw(c3023.51,1543.42) 3023.51,1572.83 ; C27.2@3002.71,1581.45 ccw(c3023.51,1602.25) 3023.51,1572.83 ; C27.2@3002.71,1581.45 ccw(c3023.51,1602.25) 3023.51,1572.83 ; C27.2@3002.71,1581.45 ccw(c3023.51,1602.25) 3023.51,1572.83 ; P2.3@3054.59,188.36 ccw(c3085.99,194.79) 3077.69,163.84 ; P2.3@3054.59,188.36 ccw(c3085.99,194.79) 3077.69,163.84 ; P2.3@3054.59,188.36 ccw(c3085.99,194.79) 3077.69,163.84 ; P2.3@3062.4,167.93 cw(c3062.4,114.75) 3100,152.36 ; P2.3@3062.4,167.93 cw(c3062.4,114.75) 3100,152.36 ; P2.3@3062.4,167.93 cw(c3062.4,114.75) 3100,152.36 ; P2.3@3064,197.77 cw(c3057.57,166.38) 3088.53,174.67 ; P2.3@3064,197.77 cw(c3057.57,166.38) 3088.53,174.67 ; P2.3@3064,197.77 cw(c3057.57,166.38) 3088.53,174.67 ; P2.3@3084.43,189.96 ccw(c3137.61,189.96) 3100,152.36 ; P2.3@3084.43,189.96 ccw(c3137.61,189.96) 3100,152.36 ; P2.3@3084.43,189.96 ccw(c3137.61,189.96) 3100,152.36 ; C26.2@3293.31,2203.13 ccw(c3293.31,2232.55) 3314.11,2211.75 ; C26.2@3293.31,2203.13 ccw(c3293.31,2232.55) 3314.11,2211.75 ; C26.2@3293.31,2203.13 ccw(c3293.31,2232.55) 3314.11,2211.75 ; C26.2@3305.49,2190.94 cw(c3334.91,2190.94) 3314.11,2211.75 ; C26.2@3305.49,2190.94 cw(c3334.91,2190.94) 3314.11,2211.75 ; C26.2@3305.49,2190.94 cw(c3334.91,2190.94) 3314.11,2211.75
  Top Layer w31.5: P7.43@1476.38,1224.02 1411.95,1224.02 ; P7.1@1476.38,3324.02 P7.3@1476.38,3224.02 1411.95,3159.59 1411.95,1224.02 ; C6.2@1718.02,736.29 ccw(c1741.91,723.15) 1728.28,699.54 ; 1806.34,717.19 cw(c1799.49,687.39) U1.2@1825.4,703.62 ; U1.2@1856.3,705.71 1710.63,739.17 1710.63,686.02 ; P8.1@2220.28,3673.43 P8.2@2220.28,3773.43 2220.28,3903.01 3485.77,3903.01 3580.61,3808.17 3580.61,3685.6 3685.6,3580.61 3807.18,3580.61 3903.01,3484.78 3903.01,2267.72 3903.01,1271.65 3903.01,513.39 3837.2,513.39 3357.81,34 3113.19,34 3011.81,34 2221.46,34 2196.82,58.63 2196.82,113.22 2175.2,134.84 2143.7,134.84 2118.82,109.96 1894.86,109.96 1629.82,375 1490.69,375 1411.95,453.74 1411.95,686.02 ; P6.58@3840.16,613.39 3902.59,613.39 ; P6.56@3840.16,713.39 3902.22,713.39 ; P6.54@3840.16,813.39 3901.63,813.39 ; P6.52@3840.16,913.39 3900.06,913.39 ; P6.2@3840.16,3413.39 3902.03,3413.39 ; 1411.95,686.02 1710.63,686.02 ; 1411.95,686.02 1411.95,1077.76 1411.95,1224.02 ; 1443.11,1224.02 cw(c1443.11,1190.75) P7.43@1466.63,1214.27 ; 1443.11,1224.02 ccw(c1443.11,1257.28) P7.43@1466.63,1233.76 ; 1443.11,1224.02 ccw(c1443.11,1257.28) P7.43@1466.63,1233.76 ; 1443.11,1224.02 cw(c1443.11,1190.75) P7.43@1466.63,1214.27 ; 1443.11,1224.02 ccw(c1443.11,1257.28) P7.43@1466.63,1233.76 ; 1443.11,1224.02 cw(c1443.11,1190.75) P7.43@1466.63,1214.27 ; 1452.85,3200.49 cw(c1476.38,3176.97) P7.3@1476.38,3210.24 ; 1452.85,3200.49 ccw(c1429.33,3224.02) P7.3@1462.6,3224.02 ; 1452.85,3200.49 ccw(c1429.33,3224.02) P7.3@1462.6,3224.02 ; 1452.85,3200.49 cw(c1476.38,3176.97) P7.3@1476.38,3210.24 ; 1452.85,3200.49 ccw(c1429.33,3224.02) P7.3@1462.6,3224.02 ; 1452.85,3200.49 cw(c1476.38,3176.97) P7.3@1476.38,3210.24 ; P7.3@1466.63,3233.76 ccw(c1443.11,3257.28) 1476.38,3257.28 ; P7.3@1466.63,3233.76 ccw(c1443.11,3257.28) 1476.38,3257.28 ; P7.3@1466.63,3233.76 ccw(c1443.11,3257.28) 1476.38,3257.28 ; P7.1@1466.63,3314.27 cw(c1443.11,3290.75) 1476.38,3290.75 ; P7.1@1466.63,3314.27 cw(c1443.11,3290.75) 1476.38,3290.75 ; P7.1@1466.63,3314.27 cw(c1443.11,3290.75) 1476.38,3290.75 ; 1476.38,3257.28 ccw(c1509.64,3257.28) P7.3@1486.12,3233.76 ; 1476.38,3257.28 ccw(c1509.64,3257.28) P7.3@1486.12,3233.76 ; 1476.38,3257.28 ccw(c1509.64,3257.28) P7.3@1486.12,3233.76 ; 1476.38,3290.75 cw(c1509.64,3290.75) P7.1@1486.12,3314.27 ; 1476.38,3290.75 cw(c1509.64,3290.75) P7.1@1486.12,3314.27 ; 1476.38,3290.75 cw(c1509.64,3290.75) P7.1@1486.12,3314.27 ; 1710.63,686.02 ccw(c1685.34,711.32) 1711.67,735.52 cw(c1685.34,711.32) 1710.63,686.02 ; P8.1@2210.53,3683.17 ccw(c2187.01,3706.69) 2220.28,3706.69 ; P8.1@2210.53,3683.17 ccw(c2187.01,3706.69) 2220.28,3706.69 ; P8.1@2210.53,3683.17 ccw(c2187.01,3706.69) 2220.28,3706.69 ; P8.2@2210.53,3763.68 cw(c2187.01,3740.16) 2220.28,3740.16 ; P8.2@2210.53,3763.68 cw(c2187.01,3740.16) 2220.28,3740.16 ; P8.2@2210.53,3763.68 cw(c2187.01,3740.16) 2220.28,3740.16 ; P8.2@2210.53,3783.17 ccw(c2187.01,3806.69) 2220.28,3806.69 ; P8.2@2210.53,3783.17 ccw(c2187.01,3806.69) 2220.28,3806.69 ; P8.2@2210.53,3783.17 ccw(c2187.01,3806.69) 2220.28,3806.69 ; 2220.28,3706.69 ccw(c2253.54,3706.69) P8.1@2230.02,3683.17 ; 2220.28,3706.69 ccw(c2253.54,3706.69) P8.1@2230.02,3683.17 ; 2220.28,3706.69 ccw(c2253.54,3706.69) P8.1@2230.02,3683.17 ; 2220.28,3740.16 cw(c2253.54,3740.16) P8.2@2230.02,3763.68 ; 2220.28,3740.16 cw(c2253.54,3740.16) P8.2@2230.02,3763.68 ; 2220.28,3740.16 cw(c2253.54,3740.16) P8.2@2230.02,3763.68 ; 2220.28,3806.69 ccw(c2253.54,3806.69) P8.2@2230.02,3783.17 ; 2220.28,3806.69 ccw(c2253.54,3806.69) P8.2@2230.02,3783.17 ; 2220.28,3806.69 ccw(c2253.54,3806.69) P8.2@2230.02,3783.17 ; 3811.59,487.77 cw(c3840.16,459.21) P6.60@3840.16,499.61 ; 3811.59,487.77 cw(c3840.16,459.21) P6.60@3840.16,499.61 ; 3811.59,487.77 cw(c3840.16,459.21) P6.60@3840.16,499.61 ; P6.60@3849.9,503.64 cw(c3873.42,480.12) 3873.42,513.39 ; P6.60@3849.9,503.64 cw(c3873.42,480.12) 3873.42,513.39 ; P6.60@3849.9,503.64 cw(c3873.42,480.12) 3873.42,513.39 ; P6.60@3849.9,523.13 ccw(c3873.42,546.65) 3873.42,513.39 ; P6.60@3849.9,523.13 ccw(c3873.42,546.65) 3873.42,513.39 ; P6.60@3849.9,523.13 ccw(c3873.42,546.65) 3873.42,513.39 ; P6.58@3849.9,603.64 cw(c3873.42,580.12) 3873.42,613.39 ; P6.58@3849.9,603.64 cw(c3873.42,580.12) 3873.42,613.39 ; P6.58@3849.9,603.64 cw(c3873.42,580.12) 3873.42,613.39 ; P6.58@3849.9,623.13 ccw(c3873.42,646.65) 3873.42,613.39 ; P6.58@3849.9,623.13 ccw(c3873.42,646.65) 3873.42,613.39 ; P6.58@3849.9,623.13 ccw(c3873.42,646.65) 3873.42,613.39 ; P6.56@3849.9,703.64 cw(c3873.42,680.12) 3873.42,713.39 ; P6.56@3849.9,703.64 cw(c3873.42,680.12) 3873.42,713.39 ; P6.56@3849.9,703.64 cw(c3873.42,680.12) 3873.42,713.39 ; P6.56@3849.9,723.13 ccw(c3873.42,746.65) 3873.42,713.39 ; P6.56@3849.9,723.13 ccw(c3873.42,746.65) 3873.42,713.39 ; P6.56@3849.9,723.13 ccw(c3873.42,746.65) 3873.42,713.39 ; P6.54@3849.9,803.64 cw(c3873.42,780.12) 3873.42,813.39 ; P6.54@3849.9,803.64 cw(c3873.42,780.12) 3873.42,813.39 ; P6.54@3849.9,803.64 cw(c3873.42,780.12) 3873.42,813.39 ; P6.54@3849.9,823.13 ccw(c3873.42,846.65) 3873.42,813.39 ; P6.54@3849.9,823.13 ccw(c3873.42,846.65) 3873.42,813.39 ; P6.54@3849.9,823.13 ccw(c3873.42,846.65) 3873.42,813.39 ; P6.52@3849.9,903.64 cw(c3873.42,880.12) 3873.42,913.39 ; P6.52@3849.9,903.64 cw(c3873.42,880.12) 3873.42,913.39 ; P6.52@3849.9,903.64 cw(c3873.42,880.12) 3873.42,913.39 ; P6.52@3849.9,923.13 ccw(c3873.42,946.65) 3873.42,913.39 ; P6.52@3849.9,923.13 ccw(c3873.42,946.65) 3873.42,913.39 ; P6.52@3849.9,923.13 ccw(c3873.42,946.65) 3873.42,913.39 ; P6.2@3849.9,3403.64 cw(c3873.42,3380.12) 3873.42,3413.39 ; P6.2@3849.9,3403.64 cw(c3873.42,3380.12) 3873.42,3413.39 ; P6.2@3849.9,3403.64 cw(c3873.42,3380.12) 3873.42,3413.39 ; P6.2@3849.9,3423.13 ccw(c3873.42,3446.65) 3873.42,3413.39 ; P6.2@3849.9,3423.13 ccw(c3873.42,3446.65) 3873.42,3413.39 ; P6.2@3849.9,3423.13 ccw(c3873.42,3446.65) 3873.42,3413.39 ; C6.2@1717.35,740.97 ccw(c1802.49,826.11) 1802.49,705.71 cw(c1802.49,826.11) C6.2@1717.35,740.97
  Top Layer w39.37: C3.2@2304.13,410.43 v1(2304.13,464.57)
  Bottom Layer w6: v1(1124.02,1271.65) 1124.02,1351.97 1150.29,1378.24 1150.29,1634.15 ; v1(1162.4,1655.51) 1162.4,1646.26 1150.29,1634.15 ; v1@1117.79,1277.88 ccw(c1102.74,1292.93) 1124.02,1292.93 ; v1@1117.79,1277.88 ccw(c1102.74,1292.93) 1124.02,1292.93 ; v1@1117.79,1277.88 ccw(c1102.74,1292.93) 1124.02,1292.93 ; 1124.02,1292.93 ccw(c1145.29,1292.93) v1@1130.25,1277.88 ; 1124.02,1292.93 ccw(c1145.29,1292.93) v1@1130.25,1277.88 ; 1124.02,1292.93 ccw(c1145.29,1292.93) v1@1130.25,1277.88 ; 1150.29,1634.15 ccw(c1138.2,1646.25) v1@1154.17,1652.36 ; 1150.29,1634.15 ccw(c1138.2,1646.25) v1@1154.17,1652.36 ; 1150.29,1634.15 ccw(c1138.2,1646.25) v1@1154.17,1652.36 ; 1156.83,1640.69 ccw(c1147.66,1649.87) v1@1159.78,1654.51 ; 1156.83,1640.69 ccw(c1147.66,1649.87) v1@1159.78,1654.51 ; 1156.83,1640.69 ccw(c1147.66,1649.87) v1@1159.78,1654.51
  Bottom Layer w39.37: v1(2212.6,585.63) 2304.13,494.09 ; v1(2304.13,464.57) 2304.13,494.09 ; 2296.7,501.53 cw(c2259.73,464.57) v1@2312.01,464.57 ; 2296.7,501.53 cw(c2259.73,464.57) v1@2312.01,464.57 ; 2296.7,501.53 cw(c2259.73,464.57) v1@2312.01,464.57 ; 2304.13,494.09 cw(c2282.12,472.08) v1@2311.59,462.02 ; 2304.13,494.09 cw(c2282.12,472.08) v1@2311.59,462.02 ; 2304.13,494.09 cw(c2282.12,472.08) v1@2311.59,462.02
  other v1: 1943.9,584.65 1986.22,585.63 2076.77,585.63 2122.05,585.63 2167.84,585.63 2031.5,586.61 1942.91,633.27 1986.22,634.06 2167.84,633.86 2212.6,634.06 2167.84,681.1 1941.93,681.89 1986.22,682.48 2212.6,682.48 1940.94,730.51 1986.22,730.91 2167.84,731.3 2212.6,731.3 1940.94,779.13 1986.22,779.33 2167.84,779.33 2212.6,779.33 1940.94,827.76 1986.22,827.76 2031.5,827.76 2076.77,827.76 2122.05,827.76 2167.84,827.76 2212.6,827.76
U5V: D6.2 D8.2 J2.1 R20.2 | length 2066.2
  Top Layer w15: R20.2@511.81,379.92 511.81,340.55 618.11,234.25 J2.1@618.11,171.75 618.11,127.95 635.83,110.24 781.5,110.24 860.24,188.98 860.24,362.33 950.66,452.76 D6.2@1084.65,452.76 1088.58,456.69 D8.2@1088.58,602.36 ; R20.2@504.59,372.7 cw(c487.15,355.26) 511.81,355.26 ; R20.2@504.59,372.7 cw(c487.15,355.26) 511.81,355.26 ; R20.2@504.59,372.7 cw(c487.15,355.26) 511.81,355.26 ; 511.81,355.26 cw(c536.48,355.26) R20.2@519.04,372.7 ; 511.81,355.26 cw(c536.48,355.26) R20.2@519.04,372.7 ; 511.81,355.26 cw(c536.48,355.26) R20.2@519.04,372.7 ; 1011.37,452.76 cw(c1011.37,397.2) D6.2@1050.66,436.48 ; 1011.37,452.76 ccw(c1011.37,508.31) D6.2@1050.66,469.03 ; 1011.37,452.76 ccw(c1011.37,508.31) D6.2@1050.66,469.03 ; 1011.37,452.76 cw(c1011.37,397.2) D6.2@1050.66,436.48 ; 1011.37,452.76 ccw(c1011.37,508.31) D6.2@1050.66,469.03 ; 1011.37,452.76 cw(c1011.37,397.2) D6.2@1050.66,436.48 ; D6.2@1068.37,469.03 ccw(c1019.59,517.82) 1088.58,517.82 ; D6.2@1068.37,469.03 ccw(c1019.59,517.82) 1088.58,517.82 ; D6.2@1068.37,469.03 ccw(c1019.59,517.82) 1088.58,517.82 ; D8.2@1072.31,586.09 cw(c1033.03,546.81) 1088.58,546.81 ; D8.2@1072.31,586.09 cw(c1033.03,546.81) 1088.58,546.81 ; D8.2@1072.31,586.09 cw(c1033.03,546.81) 1088.58,546.81 ; 1088.58,498.81 ccw(c1130.7,498.81) D6.2@1100.92,469.03 ; 1088.58,498.81 ccw(c1130.7,498.81) D6.2@1100.92,469.03 ; 1088.58,498.81 ccw(c1130.7,498.81) D6.2@1100.92,469.03 ; 1088.58,546.81 cw(c1144.14,546.81) D8.2@1104.85,586.09 ; 1088.58,546.81 cw(c1144.14,546.81) D8.2@1104.85,586.09 ; 1088.58,546.81 cw(c1144.14,546.81) D8.2@1104.85,586.09
USB_DM: R24.2 U3.32 | length 1646
  Top Layer w7: U3.32@631.89,1549.21 631.89,1507.87 v1(636.81,1502.95) ; 631.89,1518 ccw(c651.86,1518) v1@637.74,1503.88 ; 631.89,1518 ccw(c651.86,1518) v1@637.74,1503.88 ; 631.89,1518 ccw(c651.86,1518) v1@637.74,1503.88 ; U3.32@631.89,1534.9 ccw(c668.76,1534.9) v1@642.69,1508.83 ; U3.32@631.89,1534.9 ccw(c668.76,1534.9) v1@642.69,1508.83 ; U3.32@631.89,1534.9 ccw(c668.76,1534.9) v1@642.69,1508.83
  Top Layer w10: v1(636.81,490.16) 637.8,489.17 R24.2@637.8,446.85 ; R24.2@628.8,455.84 ccw(c607.1,477.55) 637.8,477.55 ; R24.2@628.8,455.84 ccw(c607.1,477.55) 637.8,477.55 ; R24.2@628.8,455.84 ccw(c607.1,477.55) 637.8,477.55 ; v1@631.99,485.34 cw(c617.99,471.34) 637.8,471.34 ; v1@631.99,485.34 cw(c617.99,471.34) 637.8,471.34 ; v1@631.99,485.34 cw(c617.99,471.34) 637.8,471.34 ; 637.8,476.09 cw(c650.88,476.09) v1@641.63,485.34 ; 637.8,476.09 cw(c650.88,476.09) v1@641.63,485.34 ; 637.8,476.09 cw(c650.88,476.09) v1@641.63,485.34 ; 637.8,477.55 ccw(c668.5,477.55) R24.2@646.79,455.84 ; 637.8,477.55 ccw(c668.5,477.55) R24.2@646.79,455.84 ; 637.8,477.55 ccw(c668.5,477.55) R24.2@646.79,455.84
  Bottom Layer w10: v1(636.81,490.16) 600.39,526.57 600.39,1371.06 636.81,1407.48 v1(636.81,1502.95) ; 625.18,501.78 cw(c613.56,490.16) v1@630,490.16 ; 625.18,501.78 ccw(c636.81,513.41) v1@636.81,496.97 ; 625.18,501.78 ccw(c636.81,513.41) v1@636.81,496.97 ; 625.18,501.78 cw(c613.56,490.16) v1@630,490.16 ; 625.18,501.78 ccw(c636.81,513.41) v1@636.81,496.97 ; 625.18,501.78 cw(c613.56,490.16) v1@630,490.16 ; v1@631.99,1498.14 cw(c620.37,1486.51) 636.81,1486.51 ; v1@631.99,1498.14 cw(c620.37,1486.51) 636.81,1486.51 ; v1@631.99,1498.14 cw(c620.37,1486.51) 636.81,1486.51 ; 636.81,1486.51 cw(c653.25,1486.51) v1@641.63,1498.14 ; 636.81,1486.51 cw(c653.25,1486.51) v1@641.63,1498.14 ; 636.81,1486.51 cw(c653.25,1486.51) v1@641.63,1498.14
USB_DP: R25.2 U3.33 | length 1811.9
  Top Layer w7: U3.33@612.2,1549.21 612.2,1494.09 v1@742.62,1363.68 ; 722.49,1383.81 ccw(c745.08,1406.4) v1@745.08,1374.45 ; 722.49,1383.81 ccw(c745.08,1406.4) v1@745.08,1374.45 ; 722.49,1383.81 ccw(c745.08,1406.4) v1@745.08,1374.45 ; 734.37,1371.93 cw(c728.58,1366.14) v1@736.77,1366.14 ; 734.37,1371.93 cw(c728.58,1366.14) v1@736.77,1366.14 ; 734.37,1371.93 cw(c728.58,1366.14) v1@736.77,1366.14 ; 734.44,1371.86 ccw(c745.08,1382.5) v1@745.08,1367.45 ; 734.44,1371.86 ccw(c745.08,1382.5) v1@745.08,1367.45 ; 734.44,1371.86 ccw(c745.08,1382.5) v1@745.08,1367.45
  Top Layer w10: R25.2@700.79,446.85 701.77,447.83 v1(701.77,490.16) ; R25.2@693.76,455.84 ccw(c674.43,475.17) 701.77,475.17 ; R25.2@693.76,455.84 ccw(c674.43,475.17) 701.77,475.17 ; R25.2@693.76,455.84 ccw(c674.43,475.17) 701.77,475.17 ; v1@696.96,485.34 cw(c685.33,473.71) 701.77,473.71 ; v1@696.96,485.34 cw(c685.33,473.71) 701.77,473.71 ; v1@696.96,485.34 cw(c685.33,473.71) 701.77,473.71 ; 701.77,473.71 cw(c718.21,473.71) v1@706.59,485.34 ; 701.77,473.71 cw(c718.21,473.71) v1@706.59,485.34 ; 701.77,473.71 cw(c718.21,473.71) v1@706.59,485.34 ; v1@701.77,479.93 ccw(c735.83,479.93) R25.2@711.75,455.84 ; v1@701.77,479.93 ccw(c735.83,479.93) R25.2@711.75,455.84 ; v1@701.77,479.93 ccw(c735.83,479.93) R25.2@711.75,455.84 ; 705.12,467.41 cw(c729.74,474.01) v1@707.67,486.75 ; 705.12,467.41 cw(c729.74,474.01) v1@707.67,486.75 ; 705.12,467.41 cw(c729.74,474.01) v1@707.67,486.75 ; 705.12,467.41 cw(c729.74,474.01) v1@707.67,486.75 ; 705.12,467.41 cw(c729.74,474.01) v1@707.67,486.75 ; 705.12,467.41 cw(c729.74,474.01) v1@707.67,486.75
  Bottom Layer w10: v1@702.76,489.17 745.08,531.5 v1@745.08,1373.03 ; v1@701.77,496.97 ccw(c701.77,518.16) 716.76,503.18 ; v1@701.77,496.97 ccw(c701.77,518.16) 716.76,503.18 ; v1@701.77,496.97 ccw(c701.77,518.16) 716.76,503.18 ; v1@708.58,490.16 cw(c720.27,490.16) 712.01,498.42 ; v1@708.58,490.16 cw(c720.27,490.16) 712.01,498.42 ; v1@708.58,490.16 cw(c720.27,490.16) 712.01,498.42 ; v1@740.26,1361.33 cw(c728.64,1349.7) 745.08,1349.7 ; v1@740.26,1361.33 cw(c728.64,1349.7) 745.08,1349.7 ; v1@740.26,1361.33 cw(c728.64,1349.7) 745.08,1349.7 ; 745.08,1349.7 cw(c761.52,1349.7) v1@749.89,1361.33 ; 745.08,1349.7 cw(c761.52,1349.7) v1@749.89,1361.33 ; 745.08,1349.7 cw(c761.52,1349.7) v1@749.89,1361.33
  other v1: 745.08,1366.14
USB_RENUMN: R21.2 U3.38 | length 1910.6
  Top Layer w7: v1(386.81,1445.87) 411.42,1470.47 U3.38@494.09,1470.47 ; v1@386.55,1447.15 ccw(c383.42,1462.42) 398.48,1458.39 ; v1@386.55,1447.15 ccw(c383.42,1462.42) 398.48,1458.39 ; v1@386.55,1447.15 ccw(c383.42,1462.42) 398.48,1458.39 ; v1@386.81,1454.18 ccw(c386.81,1474.24) 401,1460.05 ; v1@386.81,1454.18 ccw(c386.81,1474.24) 401,1460.05 ; v1@386.81,1454.18 ccw(c386.81,1474.24) 401,1460.05 ; v1@388.1,1445.6 cw(c403.37,1442.48) 399.33,1457.53 ; v1@388.1,1445.6 cw(c403.37,1442.48) 399.33,1457.53 ; v1@388.1,1445.6 cw(c403.37,1442.48) 399.33,1457.53 ; v1@395.12,1445.87 cw(c415.19,1445.87) 401,1460.05 ; v1@395.12,1445.87 cw(c415.19,1445.87) 401,1460.05 ; v1@395.12,1445.87 cw(c415.19,1445.87) 401,1460.05
  Top Layer w10: R21.2@385.83,379.92 386.81,378.94 v1(386.81,304.13) ; R21.2@376.83,370.93 cw(c352.75,346.84) 386.81,346.84 ; R21.2@376.83,370.93 cw(c352.75,346.84) 386.81,346.84 ; R21.2@376.83,370.93 cw(c352.75,346.84) 386.81,346.84 ; v1@381.99,308.95 ccw(c370.37,320.58) 386.81,320.58 ; v1@381.99,308.95 ccw(c370.37,320.58) 386.81,320.58 ; v1@381.99,308.95 ccw(c370.37,320.58) 386.81,320.58 ; 386.81,320.58 ccw(c403.25,320.58) v1@391.63,308.95 ; 386.81,320.58 ccw(c403.25,320.58) v1@391.63,308.95 ; 386.81,320.58 ccw(c403.25,320.58) v1@391.63,308.95 ; 386.81,351.6 cw(c414.15,351.6) R21.2@394.82,370.93 ; 386.81,351.6 cw(c414.15,351.6) R21.2@394.82,370.93 ; 386.81,351.6 cw(c414.15,351.6) R21.2@394.82,370.93
  Bottom Layer w10: v1(386.81,304.13) v1(386.81,1445.87) ; v1@381.99,308.95 ccw(c370.37,320.58) 386.81,320.58 ; v1@381.99,308.95 ccw(c370.37,320.58) 386.81,320.58 ; v1@381.99,308.95 ccw(c370.37,320.58) 386.81,320.58 ; v1@381.99,1441.05 cw(c370.37,1429.42) 386.81,1429.42 ; v1@381.99,1441.05 cw(c370.37,1429.42) 386.81,1429.42 ; v1@381.99,1441.05 cw(c370.37,1429.42) 386.81,1429.42 ; 386.81,320.58 ccw(c403.25,320.58) v1@391.63,308.95 ; 386.81,320.58 ccw(c403.25,320.58) v1@391.63,308.95 ; 386.81,320.58 ccw(c403.25,320.58) v1@391.63,308.95 ; 386.81,1429.42 cw(c403.25,1429.42) v1@391.63,1441.05 ; 386.81,1429.42 cw(c403.25,1429.42) v1@391.63,1441.05 ; 386.81,1429.42 cw(c403.25,1429.42) v1@391.63,1441.05
VBAT: C20.2 P2.6 U5.6 | length 3562.9
  Top Layer w6: C20.2@2222.44,1885.83 2262.8,1885.83 2310.04,1933.07 2420.29,1933.07 U5.6@2481.75,1994.54 ; C20.2@2230,1878.27 cw(c2248.24,1860.03) 2248.24,1885.83 ; C20.2@2230,1878.27 cw(c2248.24,1860.03) 2248.24,1885.83 ; C20.2@2230,1878.27 cw(c2248.24,1860.03) 2248.24,1885.83 ; C20.2@2230,1893.38 ccw(c2248.24,1911.62) 2248.24,1885.83 ; C20.2@2230,1893.38 ccw(c2248.24,1911.62) 2248.24,1885.83 ; C20.2@2230,1893.38 ccw(c2248.24,1911.62) 2248.24,1885.83 ; C20.2@2234.24,1874.03 cw(c2262.72,1845.55) 2262.72,1885.83 ; C20.2@2234.24,1874.03 cw(c2262.72,1845.55) 2262.72,1885.83 ; C20.2@2234.24,1874.03 cw(c2262.72,1845.55) 2262.72,1885.83 ; C20.2@2234.24,1897.62 ccw(c2262.72,1926.11) 2262.72,1885.83 ; C20.2@2234.24,1897.62 ccw(c2262.72,1926.11) 2262.72,1885.83 ; C20.2@2234.24,1897.62 ccw(c2262.72,1926.11) 2262.72,1885.83 ; 2455.91,1968.7 cw(c2460.87,1963.74) U5.6@2460.87,1970.75 ; 2455.91,1968.7 ccw(c2450.95,1973.66) U5.6@2457.97,1973.66 ; 2455.91,1968.7 ccw(c2450.95,1973.66) U5.6@2457.97,1973.66 ; 2455.91,1968.7 cw(c2460.87,1963.74) U5.6@2460.87,1970.75 ; 2455.91,1968.7 ccw(c2450.95,1973.66) U5.6@2457.97,1973.66 ; 2455.91,1968.7 cw(c2460.87,1963.74) U5.6@2460.87,1970.75
  Top Layer w10: U5.6@2481.75,1994.54 2559.07,2071.85 v1(2676.18,2071.85) ; 2659.74,2071.85 cw(c2659.74,2055.41) v1@2671.36,2067.03 ; 2659.74,2071.85 ccw(c2659.74,2088.29) v1@2671.36,2076.67 ; 2659.74,2071.85 ccw(c2659.74,2088.29) v1@2671.36,2076.67 ; 2659.74,2071.85 cw(c2659.74,2055.41) v1@2671.36,2067.03 ; 2659.74,2071.85 ccw(c2659.74,2088.29) v1@2671.36,2076.67 ; 2659.74,2071.85 cw(c2659.74,2055.41) v1@2671.36,2067.03
  Bottom Layer w15: v1(2676.18,2071.85) 2681.1,2071.85 2675.6,2066.35 2675.6,488.01 2810.04,353.57 2810.04,181.1 2849.41,141.73 2899.61,141.73 2951.38,89.96 P2.6@2962.4,89.96 ; 2905.98,135.36 ccw(c2962.4,191.78) P2.6@2962.4,111.99 ; 2905.98,135.36 ccw(c2962.4,191.78) P2.6@2962.4,111.99 ; 2905.98,135.36 ccw(c2962.4,191.78) P2.6@2962.4,111.99 ; 2931.59,109.75 ccw(c2962.4,140.57) P2.6@2962.4,96.99 ; 2931.59,109.75 ccw(c2962.4,140.57) P2.6@2962.4,96.99 ; 2931.59,109.75 ccw(c2962.4,140.57) P2.6@2962.4,96.99 ; 2932.59,108.75 cw(c2913.81,89.96) P2.6@2940.37,89.96 ; 2932.59,108.75 cw(c2913.81,89.96) P2.6@2940.37,89.96 ; 2932.59,108.75 cw(c2913.81,89.96) P2.6@2940.37,89.96 ; 2943.02,117.18 cw(c2932.78,78.96) P2.6@2969.88,92.74 ; 2943.02,117.18 cw(c2932.78,78.96) P2.6@2969.88,92.74 ; 2943.02,117.18 cw(c2932.78,78.96) P2.6@2969.88,92.74
VREF+: C21.2 C22.2 FB1.2 U5.21 | length 1791
  Top Layer w6: C21.2@2686.5,1544.18 2686.5,1589.09 2627.95,1647.64 2627.95,1723.16 U5.21@2690.54,1785.74 ; 2664.7,1759.91 cw(c2669.66,1754.95) U5.21@2669.66,1761.96 ; 2664.7,1759.91 ccw(c2659.74,1764.87) U5.21@2666.76,1764.87 ; 2664.7,1759.91 ccw(c2659.74,1764.87) U5.21@2666.76,1764.87 ; 2664.7,1759.91 cw(c2669.66,1754.95) U5.21@2669.66,1761.96 ; 2664.7,1759.91 ccw(c2659.74,1764.87) U5.21@2666.76,1764.87 ; 2664.7,1759.91 cw(c2669.66,1754.95) U5.21@2669.66,1761.96 ; C21.2@2674.7,1555.98 ccw(c2646.21,1584.47) 2686.5,1584.47 ; C21.2@2674.7,1555.98 ccw(c2646.21,1584.47) 2686.5,1584.47 ; C21.2@2674.7,1555.98 ccw(c2646.21,1584.47) 2686.5,1584.47 ; C21.2@2678.94,1551.74 ccw(c2660.7,1569.98) 2686.5,1569.98 ; C21.2@2678.94,1551.74 ccw(c2660.7,1569.98) 2686.5,1569.98 ; C21.2@2678.94,1551.74 ccw(c2660.7,1569.98) 2686.5,1569.98 ; 2686.5,1569.98 ccw(c2712.29,1569.98) C21.2@2694.05,1551.74 ; 2686.5,1569.98 ccw(c2712.29,1569.98) C21.2@2694.05,1551.74 ; 2686.5,1569.98 ccw(c2712.29,1569.98) C21.2@2694.05,1551.74 ; 2686.5,1584.47 ccw(c2726.78,1584.47) C21.2@2698.29,1555.98 ; 2686.5,1584.47 ccw(c2726.78,1584.47) C21.2@2698.29,1555.98 ; 2686.5,1584.47 ccw(c2726.78,1584.47) C21.2@2698.29,1555.98
  Top Layer w10: FB1.2@2645.67,1429.13 C22.2@2687.01,1470.47 ; FB1.2@2655.97,1431.91 cw(c2668.11,1435.96) 2661.71,1447.05 ; C21.2@2686.5,1544.18 2687.01,1543.67 C22.2@2687.01,1480.33 ; FB1.2@2645.37,1437.61 ccw(c2638.38,1463.69) 2661.76,1450.19 ; FB1.2@2645.37,1437.61 ccw(c2638.38,1463.69) 2661.76,1450.19 ; FB1.2@2645.37,1437.61 ccw(c2638.38,1463.69) 2661.76,1450.19 ; FB1.2@2645.37,1437.61 ccw(c2638.38,1463.69) 2661.76,1450.19 ; FB1.2@2647.64,1437.91 ccw(c2647.64,1454.36) FB1.2@2659.26,1442.73 ; FB1.2@2647.64,1437.91 ccw(c2647.64,1454.36) FB1.2@2659.26,1442.73 ; FB1.2@2647.64,1437.91 ccw(c2647.64,1454.36) FB1.2@2659.26,1442.73 ; FB1.2@2654.97,1438.44 ccw(c2613.08,1480.33) C22.2@2672.32,1480.33 ; FB1.2@2654.97,1438.44 ccw(c2613.08,1480.33) C22.2@2672.32,1480.33 ; FB1.2@2654.97,1438.44 ccw(c2613.08,1480.33) C22.2@2672.32,1480.33 ; FB1.2@2656.12,1431.41 cw(c2670.99,1435.39) 2657.66,1443.09 ; FB1.2@2656.12,1431.41 cw(c2670.99,1435.39) 2657.66,1443.09 ; FB1.2@2656.12,1431.41 cw(c2670.99,1435.39) 2657.66,1443.09 ; FB1.2@2656.12,1431.41 cw(c2670.99,1435.39) 2657.66,1443.09 ; FB1.2@2656.42,1429.13 cw(c2682.37,1429.13) 2664.02,1447.48 ; FB1.2@2656.42,1429.13 cw(c2682.37,1429.13) 2664.02,1447.48 ; FB1.2@2656.42,1429.13 cw(c2682.37,1429.13) 2664.02,1447.48 ; 2663.32,1446.73 cw(c2706.01,1435.29) C22.2@2688.83,1476.01 ; 2663.32,1446.73 cw(c2706.01,1435.29) C22.2@2688.83,1476.01 ; 2663.32,1446.73 cw(c2706.01,1435.29) C22.2@2688.83,1476.01 ; C22.2@2668.61,1466.48 cw(c2695.94,1459.16) C22.2@2684.94,1485.22 ; C22.2@2668.61,1466.48 cw(c2695.94,1459.16) C22.2@2684.94,1485.22 ; C22.2@2668.61,1466.48 cw(c2695.94,1459.16) C22.2@2684.94,1485.22 ; 2672.04,1455.51 ccw(c2647.22,1480.33) C22.2@2682.32,1480.33 ; 2672.04,1455.51 ccw(c2647.22,1480.33) C22.2@2682.32,1480.33 ; 2672.04,1455.51 ccw(c2647.22,1480.33) C22.2@2682.32,1480.33 ; C21.2@2676.11,1533.8 cw(c2649.81,1507.5) 2687.01,1507.5 ; C21.2@2676.11,1533.8 cw(c2649.81,1507.5) 2687.01,1507.5 ; C21.2@2676.11,1533.8 cw(c2649.81,1507.5) 2687.01,1507.5 ; C22.2@2676.62,1490.71 ccw(c2651.56,1515.78) 2687.01,1515.78 ; C22.2@2676.62,1490.71 ccw(c2651.56,1515.78) 2687.01,1515.78 ; C22.2@2676.62,1490.71 ccw(c2651.56,1515.78) 2687.01,1515.78 ; C22.2@2678.76,1462.23 cw(c2687.01,1453.98) C22.2@2687.01,1465.64 ; C22.2@2678.76,1462.23 cw(c2687.01,1453.98) C22.2@2687.01,1465.64 ; C22.2@2678.76,1462.23 cw(c2687.01,1453.98) C22.2@2687.01,1465.64 ; 2687.01,1509.97 cw(c2720.71,1509.97) C21.2@2696.88,1533.8 ; 2687.01,1509.97 cw(c2720.71,1509.97) C21.2@2696.88,1533.8 ; 2687.01,1509.97 cw(c2720.71,1509.97) C21.2@2696.88,1533.8 ; 2687.01,1515.78 ccw(c2722.46,1515.78) C22.2@2697.39,1490.71 ; 2687.01,1515.78 ccw(c2722.46,1515.78) C22.2@2697.39,1490.71 ; 2687.01,1515.78 ccw(c2722.46,1515.78) C22.2@2697.39,1490.71
pads on no net: J1.2 J1.3 J1.4 P5.3 P5.5 P5.11 P5.17 P5.19 P8.11 P8.17 P8.19 U2.4 U3.4 U3.11 U3.14 U3.19 U3.22 U3.40 U3.41 U3.42 U3.43 U3.45 U3.46

## Polygon pours and split planes (outlines as drawn)
GND on Top Layer "Bottom Layer-No Net" (solid, remove dead copper, pour order 4): 0,2736.22 1338.58,2736.22 1338.58,0 0,0 0,2736.22
GND on Top Layer "Bottom Layer-No Net" (solid, remove dead copper, pour order 6): 1377.95,3937.01 3937.01,3937.01 3937.01,0 1377.95,0 1377.95,3937.01
GND on Bottom Layer "Bottom Layer-No Net" (solid, remove dead copper, pour order 8): 1377.95,3937.01 3937.01,3937.01 3937.01,0 1377.95,0 1377.95,3937.01
GND on Bottom Layer "Bottom Layer-No Net" (solid, remove dead copper, pour order 10): 0,2736.22 1338.58,2736.22 1338.58,0 0,0 0,2736.22

## Keep-outs
Keep-Out Layer:
  lines w5: 0,0 0,2736.22 413.39,2736.22 ccw(c413.39,2755.91) 413.39,2775.59 0,2775.59 0,3937.01 1338.58,3937.01 1338.58,3634.84 ccw(c1358.27,3634.84) 1377.95,3634.84 1377.95,3937.01 3937.01,3937.01 3937.01,0 1377.95,0 1377.95,311.02 ccw(c1358.27,311.02) 1338.58,311.02 1338.58,0 0,0 ; 543.31,2736.22 cw(c543.31,2755.91) 543.31,2775.59 885.17,2775.59 cw(c885.17,2755.91) 885.17,2736.22 543.31,2736.22 ; 1027.56,2736.22 cw(c1027.56,2755.91) 1027.56,2775.59 1338.58,2775.59 1338.58,3482.28 cw(c1358.27,3482.28) 1377.95,3482.28 1377.95,496.06 cw(c1358.27,496.06) 1338.58,496.06 1338.58,2736.22 1027.56,2736.22

## Other copper
Top Layer:
  rectangle net TVCC: 1809.06,686.02 1923.23,725.39
  rectangle net TVCC: 1923.23,686.02 2034.45,847.44
  rectangle net TVCC: 1922.24,563.98 2237.2,847.44
  rectangle net TVCC: 1690.94,670.28 1922.24,740.16
  rectangle net TVCC: 1690.94,740.16 1777.56,950.65
  rectangle net NetC1_1: 1593.5,447.83 1908.34,651.57
  rectangle net NetC1_1: 1908.34,447.83 2239.17,554.13
  rectangle net NetC1_1: 1966.68,378.94 2239.17,554.13
  rectangle net NetC1_1: 1158.46,351.38 1254.92,483.27
  region net AGND: 2795.28,59.06 2362.2,59.06 2362.2,107.28 2402.56,107.28 2398.62,214.57 2352.36,260.83 2283.46,329.72 2283.46,380.91 2337.6,380.91 2349.41,391.73 2390.75,391.73 2390.75,359.25 2342.52,359.25 2342.52,314.96 2509.84,314.96 2509.84,374.02 2568.9,374.02 2568.9,305.12 2623.03,250.98 2765.75,250.98 2795.28,221.46
  region net AGND: 2562.4,189.96 2553.15,189.96 2532.48,210.63
  region net AGND: 2603.35,1341.54 2839.57,1342.52 2839.57,1568.9 2790.35,1568.9 2790.35,1455.71 2821.85,1455.71 2821.85,1405.51 2758.86,1405.51 2758.86,1365.16 2678.15,1365.16 2678.15,1407.48 2620.08,1407.48 2620.08,1455.71 2647.64,1455.71 2647.64,1567.91 2603.35,1567.91
Bottom Layer:
  rectangle net TVCC: 1923.23,563.98 2034.45,847.44
  rectangle net TVCC: 2034.45,563.98 2237.2,847.44
  rectangle net NetC1_1: 1158.46,351.38 1713.58,389.76
  rectangle net NetC1_1: 1593.5,351.38 1716.54,651.57